# Altium PCB JCM800-2204.PcbDoc
Units mm, origin at the board's own origin, x right, y up, seen from the top; angles counter-clockwise.
Board outline 242.32 x 81.66 mm, 2 copper layers (Top Layer, Bottom Layer); 35 components, 68 nets, 79 pads, 0 vias.
Unrouted connection lines stored in the file: 24.
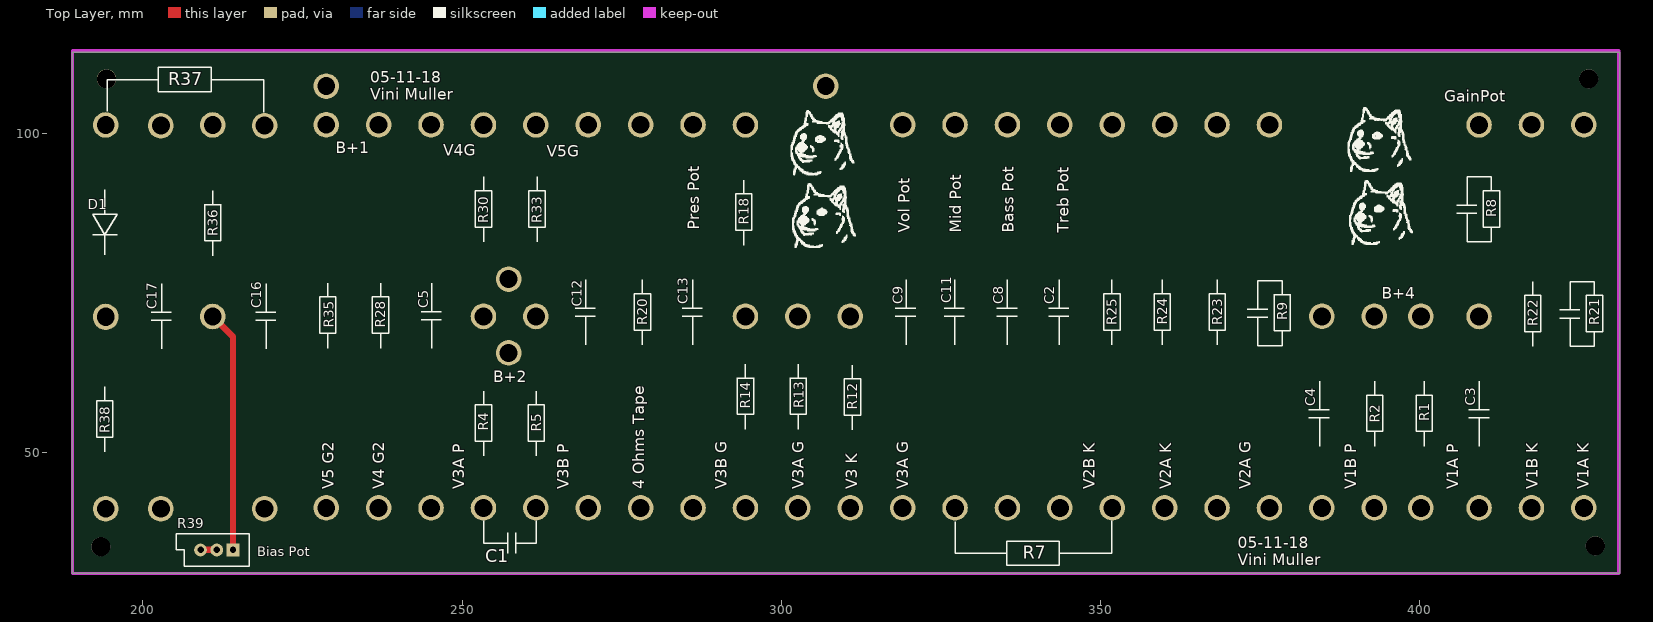
[diagram p0: Top Layer view]
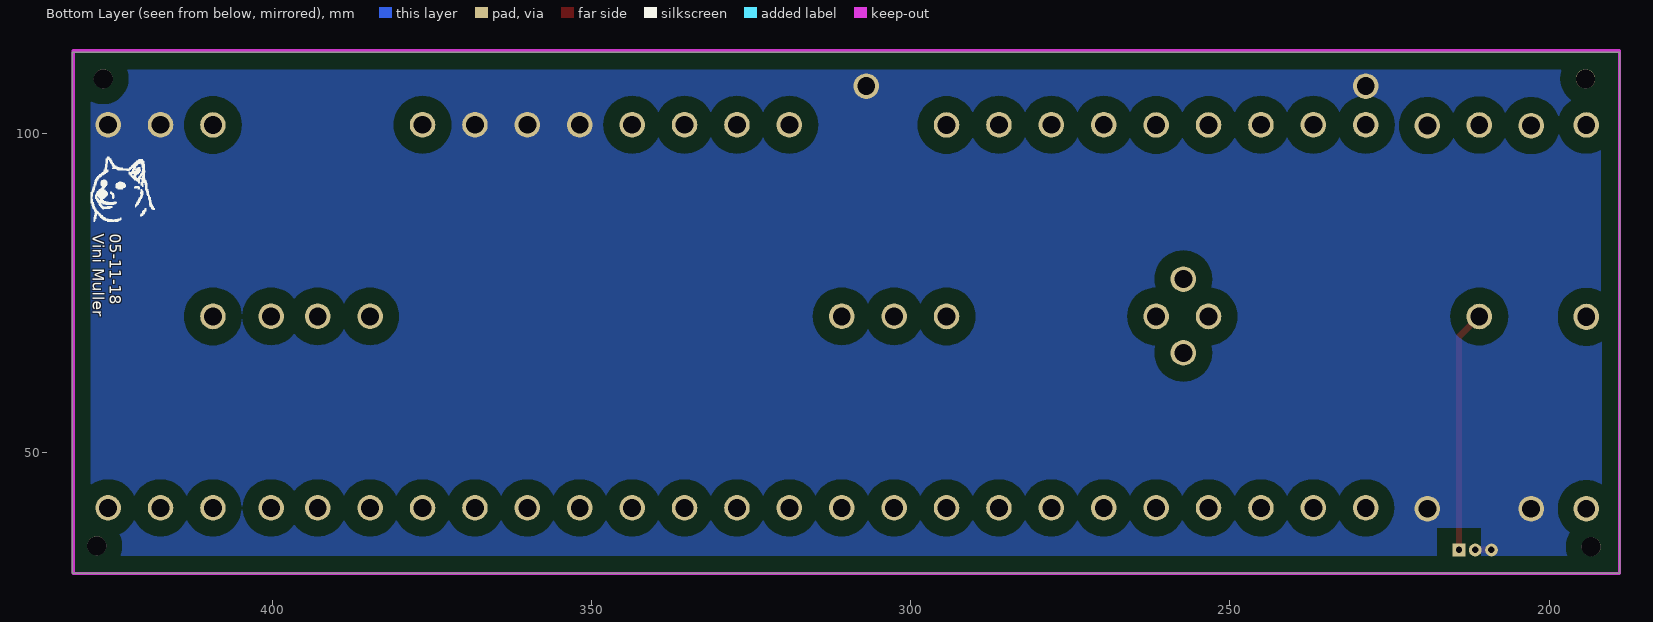
[diagram p1: Bottom Layer view, seen from below]

## Layer stack, top to bottom
Top Solder: solder mask 0.0102, Solder Resist, Dk 3.5
Top Layer: signal copper 0.0356
Dielectric 1: dielectric 0.32, FR-4, Dk 4.8
Bottom Layer: signal copper 0.0356
Bottom Solder: solder mask 0.0102, Solder Resist, Dk 3.5

## Board outline
188.976,31.115 431.292,31.115 431.292,112.776 188.976,112.776

## Design rules (kind name [scope] priority, off if disabled: settings)
Clearance [All] p1: gap=2.5
ComponentClearance [All] p1 off: gap=0.254 collisioncheckmode=3 verticalgap=0.254 showdistances=FALSE
Height [All] p1 off: minheight=0 maxheight=25.4 prefheight=12.7
PlaneConnect [All] p1: planeconnectstyle=Direct reliefexpansion=0.508 reliefentries=4 reliefconductorwidth=0.254 reliefairgap=0.254
PolygonConnect [All] p1: connectstyle=Direct reliefconductorwidth=0.254 reliefentries=4 polygonreliefangle="90 Angle" airgapwidth=0.254
RoutingVias [All] p1: holewidth=0.711 width=1.27 viastyle="Through Hole" minholewidth=0.711 minwidth=1.27 maxholewidth=0.711 maxwidth=1.27
SolderMaskExpansion [All] p1: expansion=0.102
Width [All] p1: maxlimit=2 minlimit=0.254 preferedwidth=0.254
27 further rules are at their usual default settings.

## Components (designator, comment, footprint, x,y, rotation, side; value= is the part's Value field where it differs from the comment)
C2 "Cap-cer-RSV-50V-0805" "6CM TURRET" 343.63,71.388 r180 top locked
C3 "Cap-cer-RSV-50V-0805" "3CM TURRET"#1 409.289,56.388 r180 top locked
C4 "Cap-cer-RSV-50V-0805" "3CM TURRET"#1 384.667,56.388 r0 top locked
C5 "Cap-cer-RSV-50V-0805" "6CM TURRET" 245.142,71.388 r180 top
C8 "Cap-cer-RSV-50V-0805" "6CM TURRET" 335.423,71.388 r180 top locked
C9 "Cap-cer-RSV-50V-0805" "6CM TURRET" 319.008,71.388 r0 top locked
C11 "Cap-cer-RSV-50V-0805" "6CM TURRET" 327.215,71.388 r180 top locked
C12 "Cap-cer-RSV-50V-0805" "6CM TURRET" 269.764,71.388 r180 top
C13 "Cap-cer-RSV-50V-0805" "6CM TURRET" 286.179,71.388 r0 top
C16 "Cap-cer-RSV-50V-0805" "6CM TURRET" 219.075,71.247 r180 top
C17 "Cap-cer-RSV-50V-0805" "6CM TURRET" 202.819,71.247 r180 top
D1 "1N4148" "3CM TURRET"#1 194.183,86.36 r180 top
R1 "Res-100K-0805-1%-1/8W" "3CM TURRET"#1 400.177,56.388 r0 top locked
R2 "Res-100K-0805-1%-1/8W" "3CM TURRET"#1 392.875,56.388 r0 top locked
R4 "Res-82K-0805-1%-1/8W" "3CM TURRET"#1 253.349,56.388 r0 top
R5 "Res-100K-0805-1%-1/8W" "3CM TURRET"#1 261.556,56.388 r0 top
R8 "Res-470K-0805-1%-1/8W" "3CM TURRET"#1 409.289,86.36 r180 top locked
R9 "Res-470K-0805-1%-1/8W" "6CM TURRET" 376.46,71.388 r0 top locked
R12 "Res-RSV-0805-1%-1/8W" "3CM TURRET"#1 310.801,56.388 r180 top
R13 "Res-1M-0805-1%-1/8W" "3CM TURRET"#1 302.593,56.388 r180 top
R14 "Res-1M-0805-1%-1/8W" "3CM TURRET"#2 294.386,56.388 r0 top
R18 "Res-10K-0805-1%-1/8W" "3CM TURRET"#1 294.386,86.36 r180 top
R20 "Res-100K-0805-1%-1/8W" "6CM TURRET" 277.971,71.388 r0 top
R21 "Res-2K7-0805-1%-1/8W" "6CM TURRET" 425.704,71.388 r180 top locked
R22 "Res-10K-0805-1%-1/8W" "6CM TURRET" 417.497,71.388 r180 top locked
R23 "Res-470K-0805-1%-1/8W" "6CM TURRET" 368.252,71.388 r180 top
R24 "Res-820R-0805-1%-1/8W" "6CM TURRET" 360.045,71.388 r180 top
R25 "Res-100K-0805-1%-1/8W" "6CM TURRET" 351.838,71.388 r180 top
R28 "Res-1K-0805-1%-1/8W" "6CM TURRET" 236.934,71.388 r0 top
R30 "Res-150K-0805-1%-1/8W" "3CM TURRET"#1 253.349,86.36 r0 top
R33 "Res-150K-0805-1%-1/8W" "3CM TURRET"#1 261.556,86.36 r180 top
R35 "Res-1K-0805-1%-1/8W" "6CM TURRET" 228.727,71.388 r0 top
R36 "Res-47K-0805-1%-1/8W" "3CM TURRET"#1 210.947,86.36 r0 top
R38 "Res-120K-0805-1%-1/8W" "3CM TURRET"#1 194.183,56.247 r0 top
R39 "RPot" VR5 211.582,34.798 r180 top

## Footprints (in the part's own frame and the unit in brackets; to place one, negate y for a bottom-side part, rotate by r counter-clockwise, add the part's x,y. Pads: shape width x height; smd on the part's side, far side on the other; paste and mask are expansions set on the pad)
"3CM TURRET"#1 [mm]
  round 4 hole 2.8: 1(0,-15) 2(0,15)
  body extent -1.59,-16.59 1.59,16.59, height 5.32
"3CM TURRET"#2 [mm]
  round 4 hole 2.8: 1(0,-15)
  round 4 hole 2.8 unplated: 2(0,15)
  body extent -1.59,-16.59 1.59,16.59, height 5.32
"6CM TURRET" [mm]
  round 4 hole 2.8: 1(0,-30) 2(0,30)
  body extent -1.59,-31.59 1.59,31.59, height 5.32
VR5 [mm] "Thru-Hole; 3 Leads"
  rect 2x2 hole 1: 1(-2.54,0)
  round 2 hole 1: 2(0,0) 3(2.54,0)
  silkscreen extent -5.08,-2.54 6.35,2.54

## Part data
C2 C3 C4 C5 C8 C9 C11 C12 C13 C16 C17: "Capacitor, ceramic, RSV, 50V, 0805"
D1: library part Diode-1N4148, "Diode"
R1 R2 R5 R20 R25: "Resistor, 100K, 0805, 1%, 1/8W"
R4: "Resistor, 82K, 0805, 1%, 1/8W"
R8 R9 R23: "Resistor, 470K, 0805, 1%, 1/8W"
R12: "Resistor, RSV, 0805, 1%, 1/8W"
R13 R14: "Resistor, 1M, 0805, 1%, 1/8W"
R18 R22: "Resistor, 10K, 0805, 1%, 1/8W"
R21: "Resistor, 2K7, 0805, 1%, 1/8W"
R24: "Resistor, 820R, 0805, 1%, 1/8W"
R28 R35: "Resistor, 1K, 0805, 1%, 1/8W"
R30 R33: "Resistor, 150K, 0805, 1%, 1/8W"
R36: "Resistor, 47K, 0805, 1%, 1/8W"
R38: "Resistor, 120K, 0805, 1%, 1/8W"
R39: "Potentiometer"

## Free pads (board coordinates)
  round 3 hole 3: 0(193.421,35.306) 0(194.31,108.585) 0(426.466,108.585) 0(427.482,35.433)
  round 4 hole 2.8: 2(228.727,107.442) 2(257.302,65.659) 2(257.302,77.216) 2(306.959,107.442)

## Nets (pads, with @x,y where several pads share a name; then routed paths per layer and width w, separated by ;. In a path a pad name is that pad's centre, name@x,y a point inside that pad or via, vN(x,y) a via of type N, cw(c..) or ccw(c..) an arc to the next point about the centre after c; other vN are vias at no path point)
"4 OHMS": R20.1
"8 OHMS": 
"16 OHMS": 
B: C5.1 R30.2
B+: 
B+1: R28.2 R35.2
B+2: R4.2 R5.2
B+4: R1.2 R2.2
BASSPOT: C8.1
C: C12.1 R33.1
GAINPOT: R8.1
GND: C16.2 C17.2 pad.2@228.727,107.442 pad.2@306.959,107.442 R21.1 R22.1 R23.1 R24.1 R25.1 R39.2 R39.3 | length 2.5
  Top Layer w1: R39.3 R39.2
MIDPOT: C11.1
Net*_2: 
NetC1_1: C12.2 R5.1
NetC1_2: C5.2 R4.1
NetC3_1: C3.1 R8.2
NetC4_2: C4.2 R9.2
NetC8_2: C8.2 C11.2
NetC14_2: 
NetC16_1: C16.1 pad.2@257.302,77.216 R30.1 R33.2 R36.2
NetC17_1: C17.1 D1.1
NetC18_1: 
NetD1_2: D1.2 R38.2
NetD2_1: 
NetD2_2: 
NetD4_1: 
NetD4_2: 
NetDS1_1: 
NetDS1_2: 
NetF2_1: 
NetF2_2: 
NetJ1_1: 
NetJ4_1: 
NetJ4_2: 
NetR3_1: 
NetR6_3: 
NetR10_2: 
NetR12_1: R12.1 R13.1 R14.2 R18.2
NetR29_2: 
NetR32_1: 
NetR34_2: 
NetR36_1: R36.1 R39.1 | length 37.9
  Top Layer w1: R36.1 214.122,68.185 R39.1
NetR38_1: R38.1
NetS1_3: 
NetS3_1: 
NetS3_3: 
NetT1_1: 
NetT1_2: 
PRESPOT: C13.2 R18.1 R20.2
TREBPOT: C2.1
V1AG: 
V1AK: R21.2
V1AP: C3.2 R1.1
V1BG: 
V1BK: R22.2
V1BP: C4.1 R2.1
V2AG: R9.1 R23.2
V2AK: R24.2
V2BK: C2.2 R25.2
V2BP: 
V3AG: C9.1 R13.2
V3BG: C13.1 R14.1
V3K: R12.2
"V4 G2": R28.1
"V4 K": 
"V5 G2": R35.1
VOLPOT: C9.2

## Polygon pours and split planes (outlines as drawn)
GND on Bottom Layer "Bottom Layer-No Net" (solid, remove dead copper, pour order 2): 191.516,73.66 191.516,35.687 ccw(c194.056,35.687) 194.056,33.147 310.388,33.147 426.593,33.147 ccw(c426.593,35.687) 429.133,35.687 429.133,71.755 429.133,107.442 ccw(c426.593,107.442) 426.593,109.982 307.975,109.982 194.437,109.982 ccw(c194.437,107.442) 191.897,107.442 191.897,73.66

## Keep-outs
Keep-Out Layer:
  lines w0.5: 188.976,31.115 188.976,113.03 431.165,113.03 431.165,31.115 188.976,31.115

## Silkscreen, mask and mechanical layers (free items; w line width, h text height)
Top Overlay:
  drawing of 44264 lines, arcs and shapes, not listed
  text "R37" at 203.962,107.569 h2
  text "05-11-18 / Vini Muller" at 235.585,105.283 h1.8
  text "GainPot" at 403.86,105.029 h1.8
  text "B+1" at 230.251,96.901 h1.8
  text "V4G" at 247.015,96.52 h1.8
  text "V5G" at 263.271,96.393 h1.8
  text "Pres Pot" at 287.147,84.963 h1.8 r90
  text "Vol Pot" at 320.131,84.455 h1.8 r90
  text "Mid Pot" at 328.168,84.455 h1.8 r90
  text "Bass Pot" at 336.423,84.455 h1.8 r90
  text "Treb Pot" at 345.059,84.455 h1.8 r90
  text "B+4" at 394.081,74.168 h1.8
  text "B+2" at 254.889,61.087 h1.8
  text "V5 G2" at 229.87,44.323 h1.8 r90
  text "V4 G2" at 237.834,44.323 h1.8 r90
  text "V3A P" at 250.317,44.323 h1.8 r90
  text "V3B P" at 266.7,44.323 h1.8 r90
  text "4 Ohms Tape" at 278.571,44.323 h1.8 r90
  text "V3B G" at 291.465,44.323 h1.8 r90
  text "V3A G" at 303.53,44.323 h1.8 r90
  text "V3 K" at 311.912,44.323 h1.8 r90
  text "V3A G" at 319.913,44.323 h1.8 r90
  text "V2B K" at 349.123,44.323 h1.8 r90
  text "V2A K" at 361.061,44.323 h1.8 r90
  text "V2A G" at 373.507,44.323 h1.8 r90
  text "V1B P" at 390.017,44.323 h1.8 r90
  text "V1A P" at 406.019,44.323 h1.8 r90
  text "V1B K" at 418.465,44.323 h1.8 r90
  text "V1A K" at 426.466,44.323 h1.8 r90
  text "Bias Pot" at 217.932,33.782 h1.5
  text "R7" at 337.82,33.401 h2
  text "C1" at 253.619,32.893 h2
  text "05-11-18 / Vini Muller" at 371.475,32.385 h1.8
Bottom Overlay:
  drawing of 11007 lines, arcs and shapes, not listed
  text "05-11-18 / Vini Muller" at 428.117,84.328 h1.8 r90
Mechanical 2:
  lines w1: 194.183,101.36 202.706,101.36 ; 210.947,101.36 218.962,101.36 ; 219.075,101.247 219.075,92.202 234.061,77.216 257.302,77.216 ; 228.727,101.388 236.934,101.388 ; 245.142,41.388 253.349,41.388 ; 245.142,101.388 253.321,101.388 ; 261.556,41.388 269.764,41.388 ; 261.556,101.36 269.736,101.36 ; 277.971,101.388 286.179,101.388 294.358,101.388 ; 286.179,41.388 294.386,41.388 ; 294.386,71.388 302.593,71.388 310.801,71.388 ; 302.593,41.388 307.56,46.355 314.041,46.355 319.008,41.388 ; 327.215,41.388 335.423,41.388 ; 343.63,41.388 351.838,41.388 ; 351.838,101.388 360.045,101.388 368.252,101.388 372.528,105.664 413.221,105.664 417.497,101.388 425.704,101.388 ; 368.252,41.388 376.46,41.388 ; 384.667,41.388 392.874,41.388 ; 392.875,71.388 400.177,71.388 ; 400.177,41.388 409.289,41.388

## Dimensions
427.482,35.433 to 193.421,35.306 on Mechanical 1